# Altium PCB Chaos_Speaker.PcbDoc
Units mil, origin at the board's own origin, x right, y up, seen from the top; angles counter-clockwise.
Board outline 2330 x 1665 mil, 2 copper layers (Top Layer, Bottom Layer); 14 components, 12 nets, 66 pads, 0 vias.
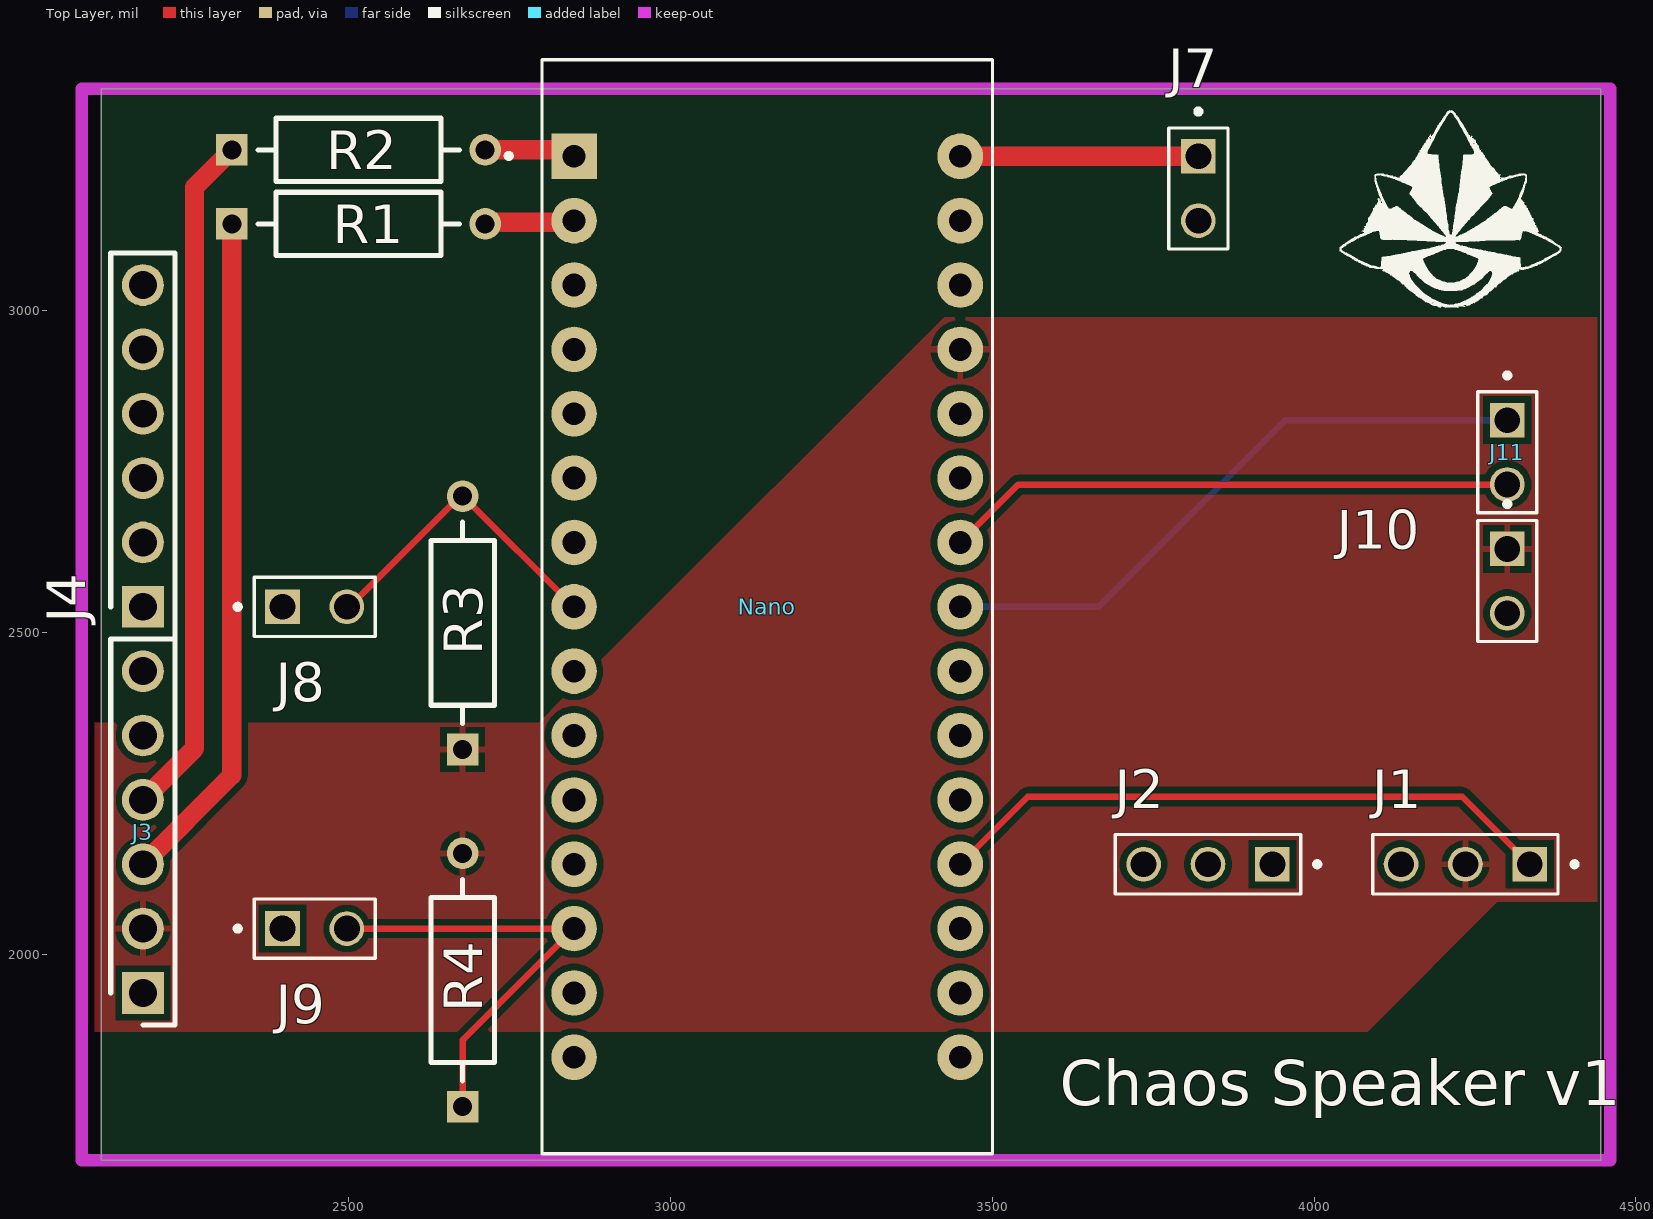
[diagram p0: Top Layer view]
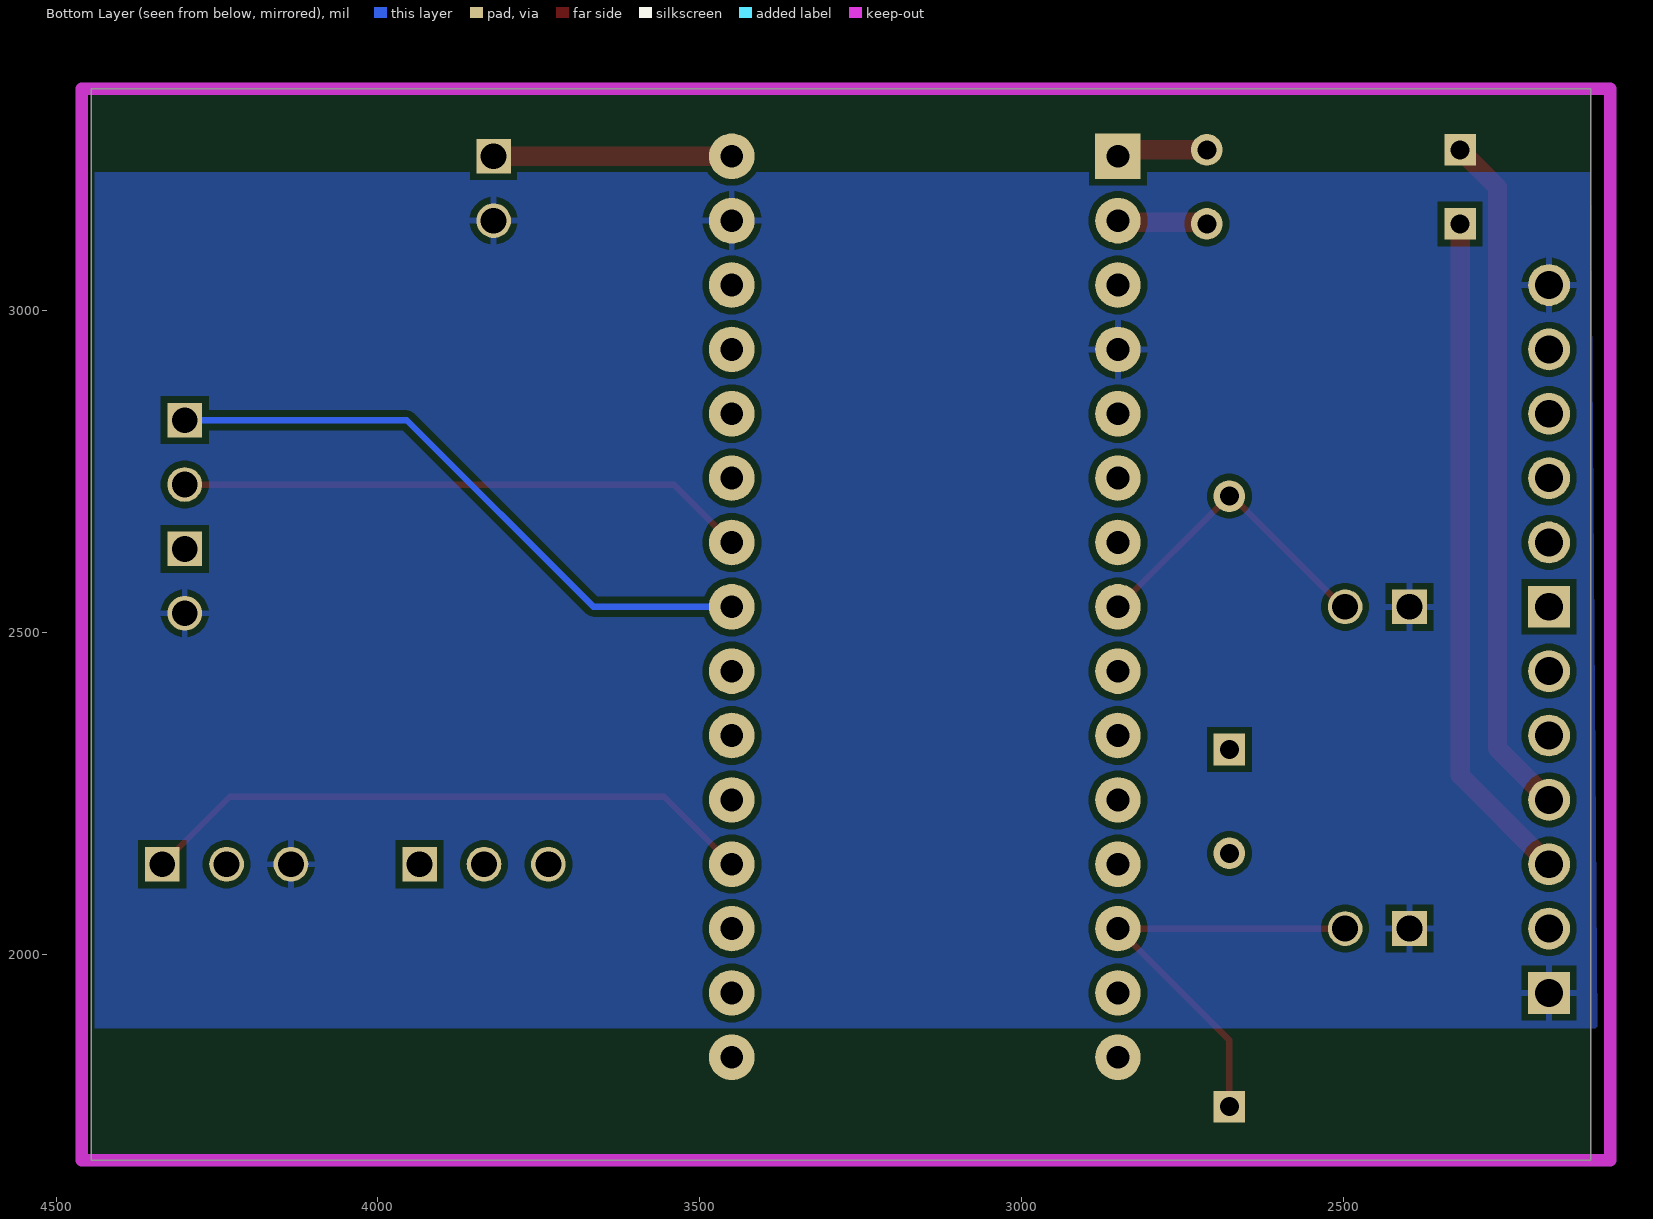
[diagram p1: Bottom Layer view, seen from below]
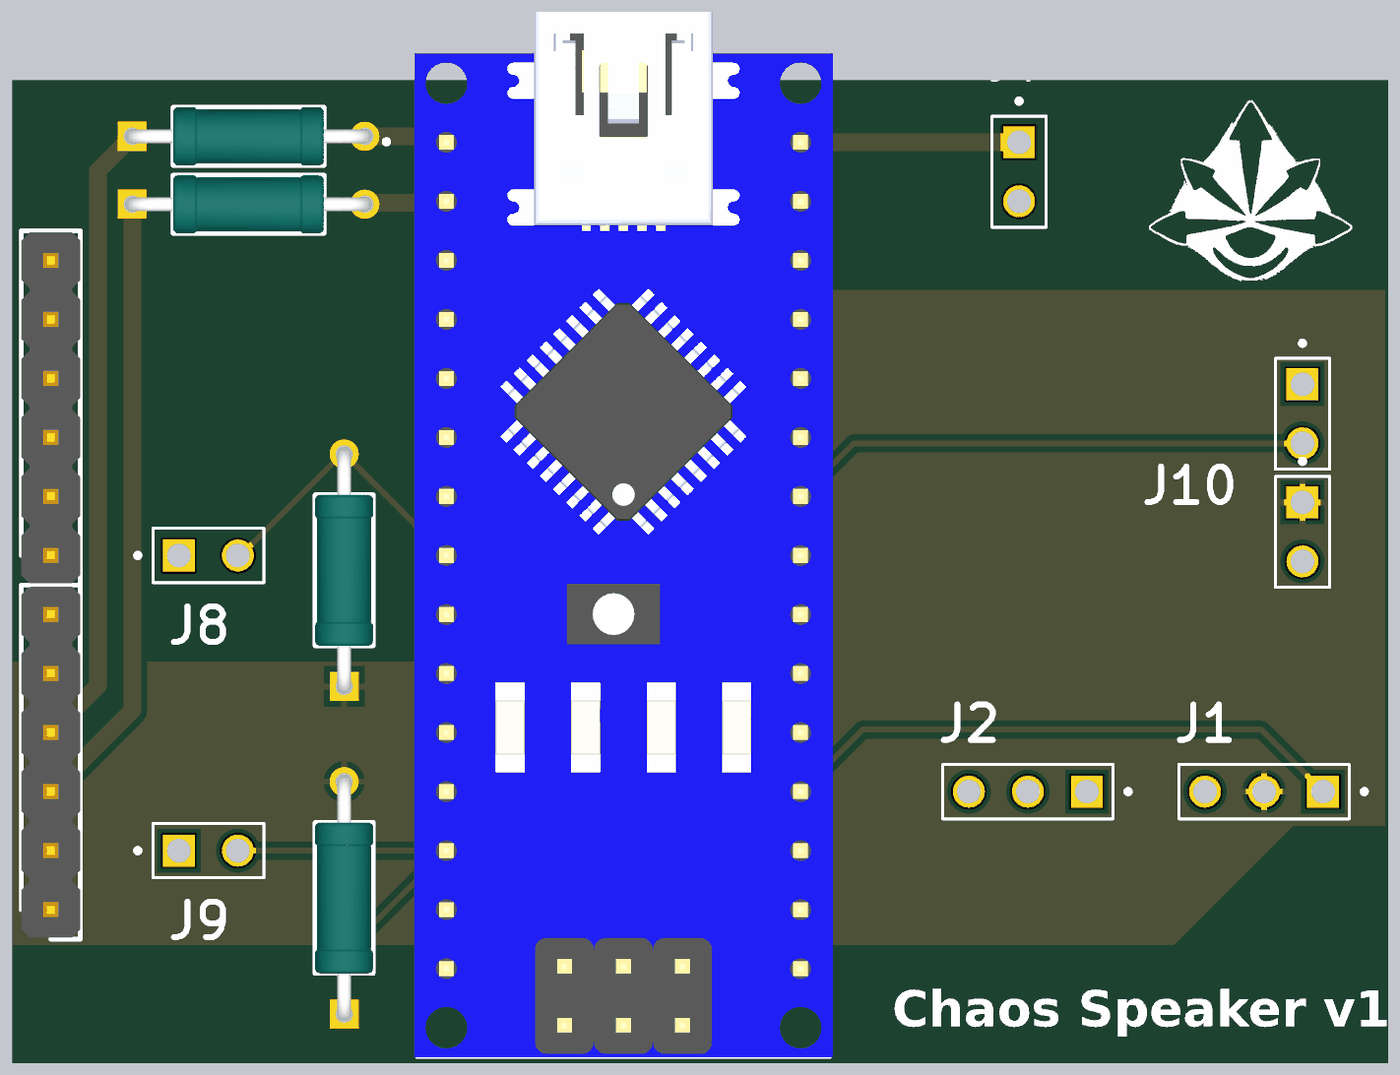
[diagram p2: 3D render of the assembled board from above, using the file's embedded part models]

## Layer stack, top to bottom
Top Solder: solder mask 0.4, Solder Resist, Dk 3.5
Top Layer: signal copper 1.4
Dielectric 1: dielectric 12.6, FR-4, Dk 4.8
Bottom Layer: signal copper 1.4
Bottom Solder: solder mask 0.4, Solder Resist, Dk 3.5

## Board outline
2115,1680 4445,1680 4445,3345 2115,3345

## Design rules (kind name [scope] priority, off if disabled: settings)
Clearance [All] p1: gap=10 ignorepadtopadclearanceinfootprint=FALSE except(0: Arc-Hole Track-Hole SMDPad-Hole THPad-Hole Via-Hole Fill-Hole Poly-Hole Region-Hole Text-Hole)
PolygonConnect [All] p1: connectstyle=Relief reliefconductorwidth=10 reliefentries=4 polygonreliefangle="90 Angle" airgapwidth=10
RoutingVias [All] p1: holewidth=28 width=50 viastyle="Through Hole" minholewidth=28 minwidth=50 maxholewidth=28 maxwidth=50
SolderMaskExpansion [All] p1: expansion=4 istentingtop=FALSE
Width [All] p1: maxlimit=30 minlimit=10 preferedwidth=10 bottomlayer_maxwidth=10 minimp=50.000000 maximp=50.000000 favimp=50.000000
30 further rules are at their usual default settings.

## Components (designator, comment, footprint, x,y, rotation, side; value= is the part's Value field where it differs from the comment)
J1 "644884-3" TE_644884-3 4335,2140 r180 top
J2 "644884-3" TE_644884-3 3935,2140 r180 top
J3 "240-004" HDRV6W64P0X254_1X6_1524X254X909P 2180,1940 r270 top
J4 "240-004" HDRV6W64P0X254_1X6_1524X254X909P 2180,2540 r270 top
J7 "3-644456-2" TE_3-644456-2 3820,3240 r270 top
J8 "3-644456-2" TE_3-644456-2 2396.85,2540 r0 top
J9 "3-644456-2" TE_3-644456-2 2396.85,2040 r0 top
J10 "3-644456-2" TE_3-644456-2 4300,2630 r270 top
J11 "3-644456-2" TE_3-644456-2 4300,2830 r270 top
Nano "ARDUINO_NANO" SHIELD_ARDUINO_NANO 3150,2540 r0 top
R1 "MRS25000C1001FCT00" FP-MRS25-MFG 2515,3135 r0 top
R2 "MRS25000C1001FCT00" FP-MRS25-MFG 2515,3250 r0 top
R3 "MRS25000C1001FCT00" FP-MRS25-MFG 2676.85,2515 r90 top
R4 "MRS25000C1001FCT00" FP-MRS25-MFG 2676.85,1960 r90 top

## Footprints (in the part's own frame and the unit in brackets; to place one, negate y for a bottom-side part, rotate by r counter-clockwise, add the part's x,y. Pads: shape width x height; smd on the part's side, far side on the other; paste and mask are expansions set on the pad)
FP-MRS25-MFG [mm]
  rect 1.25x1.25 hole 0.75 paste-2539.97 mask+0: 1(-5,0)
  round 1.25 hole 0.75 paste-2539.97 mask+0: 2(5,0)
  silkscreen extent -3.98,-1.25 3.98,1.25, body extent -5.72,-1.35 5.72,1.35, height 0.25
HDRV6W64P0X254_1X6_1524X254X909P [mm]
  rect 1.65x1.65 hole 1.1: 1(0,0)
  round 1.65 hole 1.1: 2(-2.54,0) 3(-5.08,0) 4(-7.62,0) 5(-10.16,0) 6(-12.7,0)
  silkscreen extent -13.97,-1.27 1.27,1.27, body extent -13.9,-1.27 1.2,1.27, height 8.85
SHIELD_ARDUINO_NANO [mm]
  rect 1.8x1.8 / inner round 1.8 / far side rect 1.8x1.8 hole 0.9: 1(-7.62,17.78)
  round 1.8 hole 0.9: 2(-7.62,15.24) 3(-7.62,12.7) 4(-7.62,10.16) 5(-7.62,7.62) 6(-7.62,5.08) 7(-7.62,2.54) 8(-7.62,0) 9(-7.62,-2.54) 10(-7.62,-5.08) 11(-7.62,-7.62) 12(-7.62,-10.16) 13(-7.62,-12.7) 14(-7.62,-15.24) 15(-7.62,-17.78) 16(7.62,-17.78) 17(7.62,-15.24) 18(7.62,-12.7) 19(7.62,-10.16) 20(7.62,-7.62) 21(7.62,-5.08) 22(7.62,-2.54) 23(7.62,0) 24(7.62,2.54) 25(7.62,5.08) 26(7.62,7.62) 27(7.62,10.16) 28(7.62,12.7) 29(7.62,15.24) 30(7.62,17.78)
  silkscreen extent -10.3,-21.59 8.89,21.59, body extent -9,-21.6 9,23.4, height 12.6
TE_3-644456-2 [mm]
  rect 1.37x1.37 hole 1.02: 1(0,0)
  round 1.37 hole 1.02: 2(2.54,0)
  silkscreen extent -1.87,-1.17 3.66,1.17
TE_644884-3 [mm]
  rect 1.37x1.37 hole 1.02: 1(0,0)
  round 1.37 hole 1.02: 2(2.54,0) 3(5.08,0)
  silkscreen extent -1.87,-1.17 6.2,1.17

## Part data
J1 J2: library part CMP-031-000000-1, Package=None, Availability=Unavailable, Component Type=Standard, Design Item ID=644884-3, MP=644884-3, Pin Count=3, Price=None, Source=644884-3.SchLib
J3 J4: "Connector", Manufacturer_Name=Digilent, Arrow Part Number=240-004, Arrow Price/Stock=https://www.arrow.com/en/products/240-004/digilent?region=nac, Datasheet Link=https://digilent.com/reference/_media/reference/test-and-measurement/6-pin-header-gender-changer/163-068-2.pdf, Height=9.09mm, Manufacturer_Part_Number=240-004
J7 J8 J9 J10 J11: library part CMP-012-000001-1, "Connector Unshrouded Header HDR 2 Position 2.54mm Solder Straight Thru-Hole", Package=None, Centerline_Pitch="2.54 mm[.1 in]", Component Type=Standard, Design Item ID=3-644456-2, Digi-Key_Part_Number=A31112-ND, Digi-Key_Purchase_URL=https://www.digikey.com/product-detail/en/te-connectivity-amp-connectors/3-644456-2/A31112-ND/698344?utm_source=snapeda&utm_medium=aggregator&utm_campaign=symbol, EU_RoHS_Compliance=Compliant, MF="TE Connectivity", MP=3-644456-2, Number_of_Positions=2, Pin Count=2, Product_Type=Connector, SnapEDA_Link=https://www.snapeda.com/parts/3-644456-2/TE%20Connectivity%20AMP%20Connectors/view-part/520887/?ref=snap, Source=SnapEDAsch.SchLib, TE_purchase_URL=https://www.te.com/usa-en/product-3-644456-2.html?te_bu=Cor&te_type=disp&te_campaign=seda_glo_cor-seda-global-disp-prtnr-fy19-seda-model-bom-cta_sma-317_1&elqCampaignId=32493
Nano: library part CMP-029-000000-1, "Small, complete, and breadboard-friendly board based on the ATmega328 (Arduino Nano 3.x)", Package="Non-Standard Arduino", Availability="Not in stock", Check_prices=https://www.snapeda.com/parts/Arduino%20Nano/Arduino/view-part/?ref=eda, Component Type=Standard, Design Item ID=ARDUINO_NANO, MF=Arduino, MP="Arduino Nano", Pin Count=30, Price=None, SnapEDA_Link=https://www.snapeda.com/parts/Arduino%20Nano/Arduino/view-part/?ref=snap, Source=ARDUINO_NANO.SchLib
R1 R2: library part CMP-02408-000051-1, "RES 1K OHM 0.6W 1% AXIAL", Case/Package=Axial, Max Operating Temperature=155°C, Max Power Dissipation=600mW, Min Operating Temperature=-55°C, Package Quantity=5000, Resistance=1k, Resistance Tolerance=1%, Resistor Type="Metal Film", Temperature Coefficient=50ppm/°C, Voltage Rating=350V, Construction=Cylindrical, Contact Plating=Tin, Diameter=2.5mm, Lead Diameter=0.6mm, Lead Free="Lead Free", Length=6.5mm, Military Standard=Not, Mount="Through Hole", Number of Pins=2, Number of Terminations=2, Packaging="Tape and Reel", Power Rating=600mW, Radiation Hardening=No, RoHS Compliant=Yes, Series=MRS25, Technology="THIN FILM", Termination=Axial, Tolerance=1%, Voltage Rating (DC)=350V, Weight=0.00776oz, Width=2.5mm
R3 R4: library part CMP-02408-000051-1, "RES 1K OHM 0.6W 1% AXIAL", Case/Package=Axial, Max Operating Temperature=155°C, Max Power Dissipation=600mW, Min Operating Temperature=-55°C, Package Quantity=5000, Resistance=4.7k, Resistance Tolerance=1%, Resistor Type="Metal Film", Temperature Coefficient=50ppm/°C, Voltage Rating=350V, Construction=Cylindrical, Contact Plating=Tin, Diameter=2.5mm, Lead Diameter=0.6mm, Lead Free="Lead Free", Length=6.5mm, Military Standard=Not, Mount="Through Hole", Number of Pins=2, Number of Terminations=2, Packaging="Tape and Reel", Power Rating=600mW, Radiation Hardening=No, RoHS Compliant=Yes, Series=MRS25, Technology="THIN FILM", Termination=Axial, Tolerance=1%, Voltage Rating (DC)=350V, Weight=0.00776oz, Width=2.5mm

## Nets (pads, with @x,y where several pads share a name; then routed paths per layer and width w, separated by ;. In a path a pad name is that pad's centre, name@x,y a point inside that pad or via, vN(x,y) a via of type N, cw(c..) or ccw(c..) an arc to the next point about the centre after c; other vN are vias at no path point)
+5: J1.2 J3.2 J10.1 Nano.27 R3.1 R4.2
GND: J1.3 J3.1 J4.6 J7.2 J8.1 J9.1 J10.2 Nano.4 Nano.29
NetJ3_4: J3.4 R2.1 | length 1067.2
  Top Layer w30: J3.4 2260,2320 2260,3191.85 R2.1
NetJ7_1: J7.1 Nano.30 | length 370
  Top Layer w30: Nano.30 J7.1
NetJ8_2: J8.2 Nano.8 R3.2 | length 495.5
  Top Layer w10: J8.2 2500.93,2540 2672.78,2711.85 R3.2 2677.5,2711.85 2849.35,2540 Nano.8
NetJ9_2: J9.2 Nano.13 R4.1 | length 701.7
  Top Layer w10: J9.2 Nano.13 2676.85,1866.85 R4.1
NetNano_1: Nano.1 R2.2 | length 142.3
  Top Layer w10: Nano.1@2840,3250 Nano.1
  Top Layer w30: R2.2 Nano.1@2840,3250
NetNano_2: Nano.2 R1.2 | length 140.2
  Top Layer w10: R1.2 R1.2@2714.35,3137.5 ; Nano.2@2847.5,3137.5 Nano.2
  Top Layer w30: R1.2@2714.35,3137.5 Nano.2@2847.5,3137.5
PotA: J1.1 Nano.19 | length 972
  Top Layer w10: Nano.19 3555,2245 4230,2245 J1.1
Rx: J3.3 R1.1 | length 1059.3
  Top Layer w10: R1.1@2313.15,3140 R1.1
  Top Layer w30: J3.3 2318.15,2278.15 R1.1
SCK: J11.2 Nano.24 | length 887.3
  Top Layer w10: Nano.24 3540,2730 J11.2
SDA: J11.1 Nano.23 | length 970.1
  Bottom Layer w10: Nano.23 3665,2540 3955,2830 J11.1
pads on no net: J2.1 J2.2 J2.3 J3.5 J3.6 J4.1 J4.2 J4.3 J4.4 J4.5 Nano.3 Nano.5 Nano.6 Nano.7 Nano.9 Nano.10 Nano.11 Nano.12 Nano.14 Nano.15 Nano.16 Nano.17 Nano.18 Nano.20 Nano.21 Nano.22 Nano.25 Nano.26 Nano.28

## Polygon pours and split planes (outlines as drawn)
+5 on Top Layer "+5_L01_P001" (solid, pour order 1): 4440,2081.62 4284.68,2081.62 4083.06,1880 2105,1880 2105,2360 2795,2360 3425,2990 4440,2990
GND on Bottom Layer "GND_L02_P002" (solid, pour order 2): 2115,3215 4440,3215 4440,1885 2105,1885

## Keep-outs
Keep-Out Layer:
  lines w20: 2085,1680 2085,3345 4460,3345 4460,1680 2085,1680

## Silkscreen, mask and mechanical layers (free items; w line width, h text height)
Top Overlay:
  region: 554 vertices and 13 holes, not listed, extent 4039.88,3004.93 4384.67,3311.41
  text "Chaos Speaker v1" at 3605,1742.33 h120
Mechanical 13:
  region: 4292.05,3207.93 4290.67,3208.92 4290.87,3209.51 4292.45,3209.12 4293.04,3208.52 4292.25,3208.13
  region: 4350.51,3121.44 4349.72,3121.04 4349.52,3121.63 4350.11,3122.23 4350.7,3121.63
  region: 4228.47,3005.72 4228.66,3005.12 4228.07,3004.53 4224.91,3004.93 4224.72,3005.52 4224.91,3005.72 4225.31,3005.32 4227.28,3006.11 4228.27,3005.91
  region: 4361.97,2852.6 4361.74,2852.37 4361.5,2852.6 4361.74,2852.83
  region: 4194.97,3204.83 4194.74,3205.52 4195.44,3205.75 4195.67,3204.6 4195.44,3204.37 4195.2,3204.6
  region: 4409.55,2905.26 4408.85,2904.57 4407.47,2905.03 4407.24,2905.72 4407.93,2906.41 4409.32,2905.95 4409.55,2905.72
  region: 4367.74,2832.97 4367.97,2832.73 4367.74,2832.5 4367.51,2832.73
  region: 4123.37,2632.48 4121.99,2632.02 4118.29,2632.48 4116.67,2633.17 4116.9,2634.33 4118.75,2634.79 4119.21,2634.33 4119.68,2635.25 4121.52,2634.79 4124.06,2634.1 4123.6,2632.71
  region: 4274.66,3108.98 4272.12,3108.28 4270.04,3109.44 4269.58,3111.29 4270.27,3111.52 4272.58,3110.13 4274.43,3109.21